# Altium PCB Carrier_Board.PcbDoc (part 1 of 2)
Units mil, origin at the board's own origin, x right, y up, seen from the top; angles counter-clockwise.
Board outline 6800 x 4000 mil, 4 copper layers (Top Layer, PWR, GND, Bottom Layer), stack 62.8 mil thick; 110 components, 87 nets, 805 pads, 134 vias.
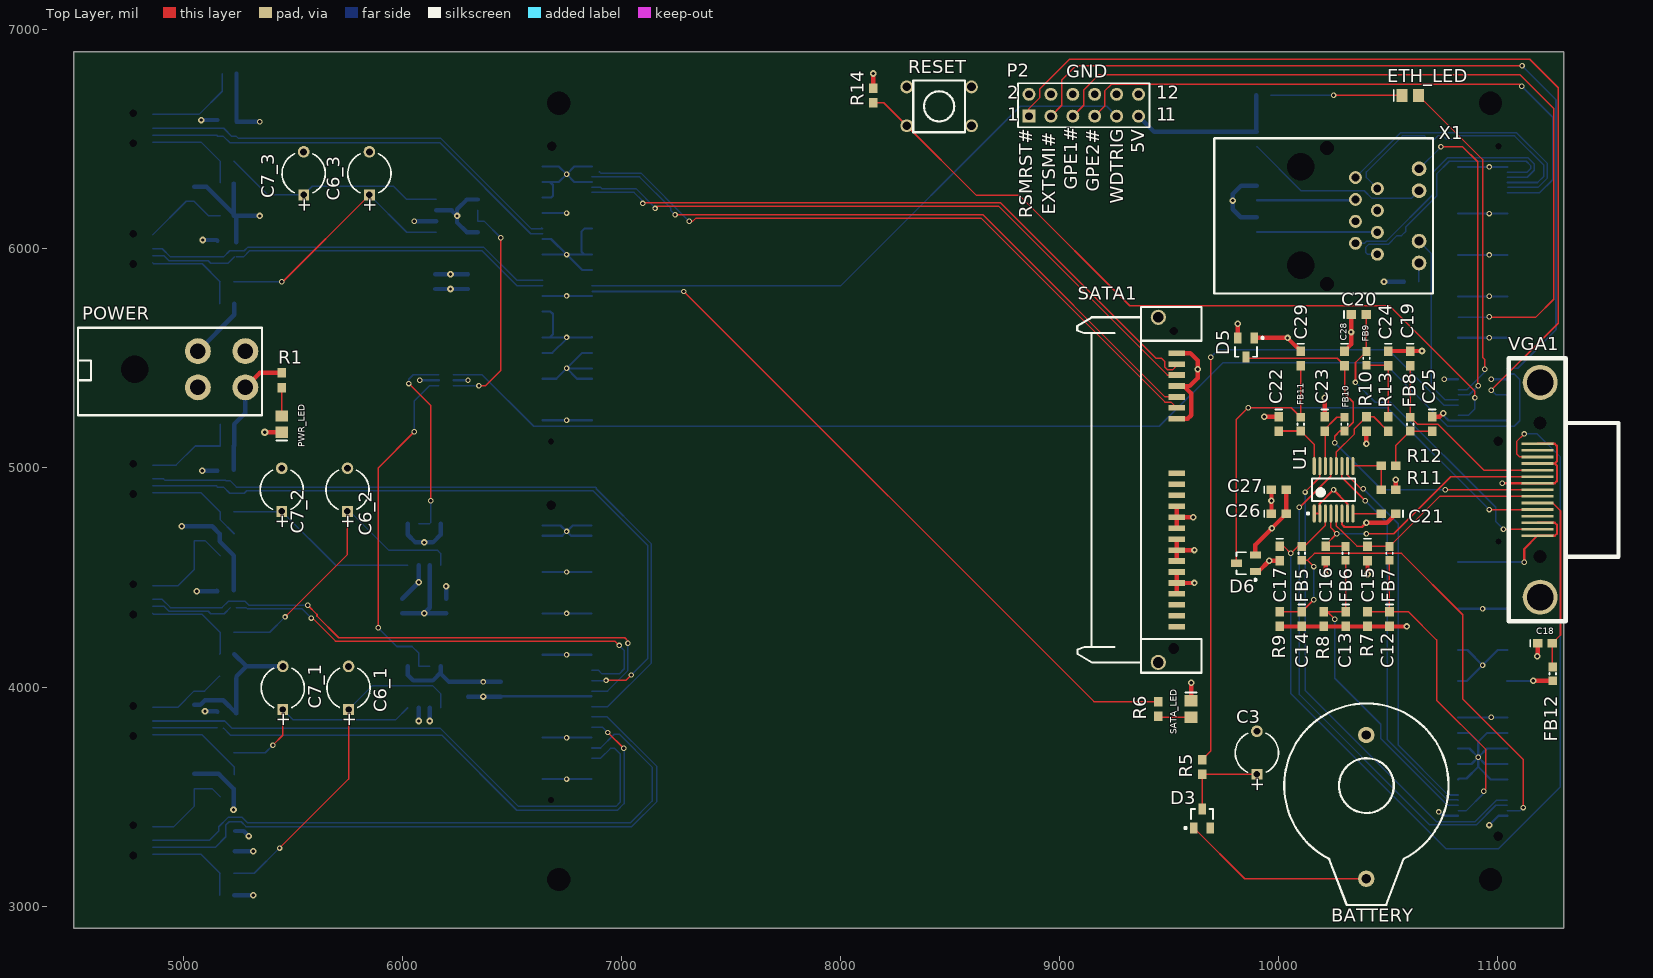
[diagram p0: Top Layer view]
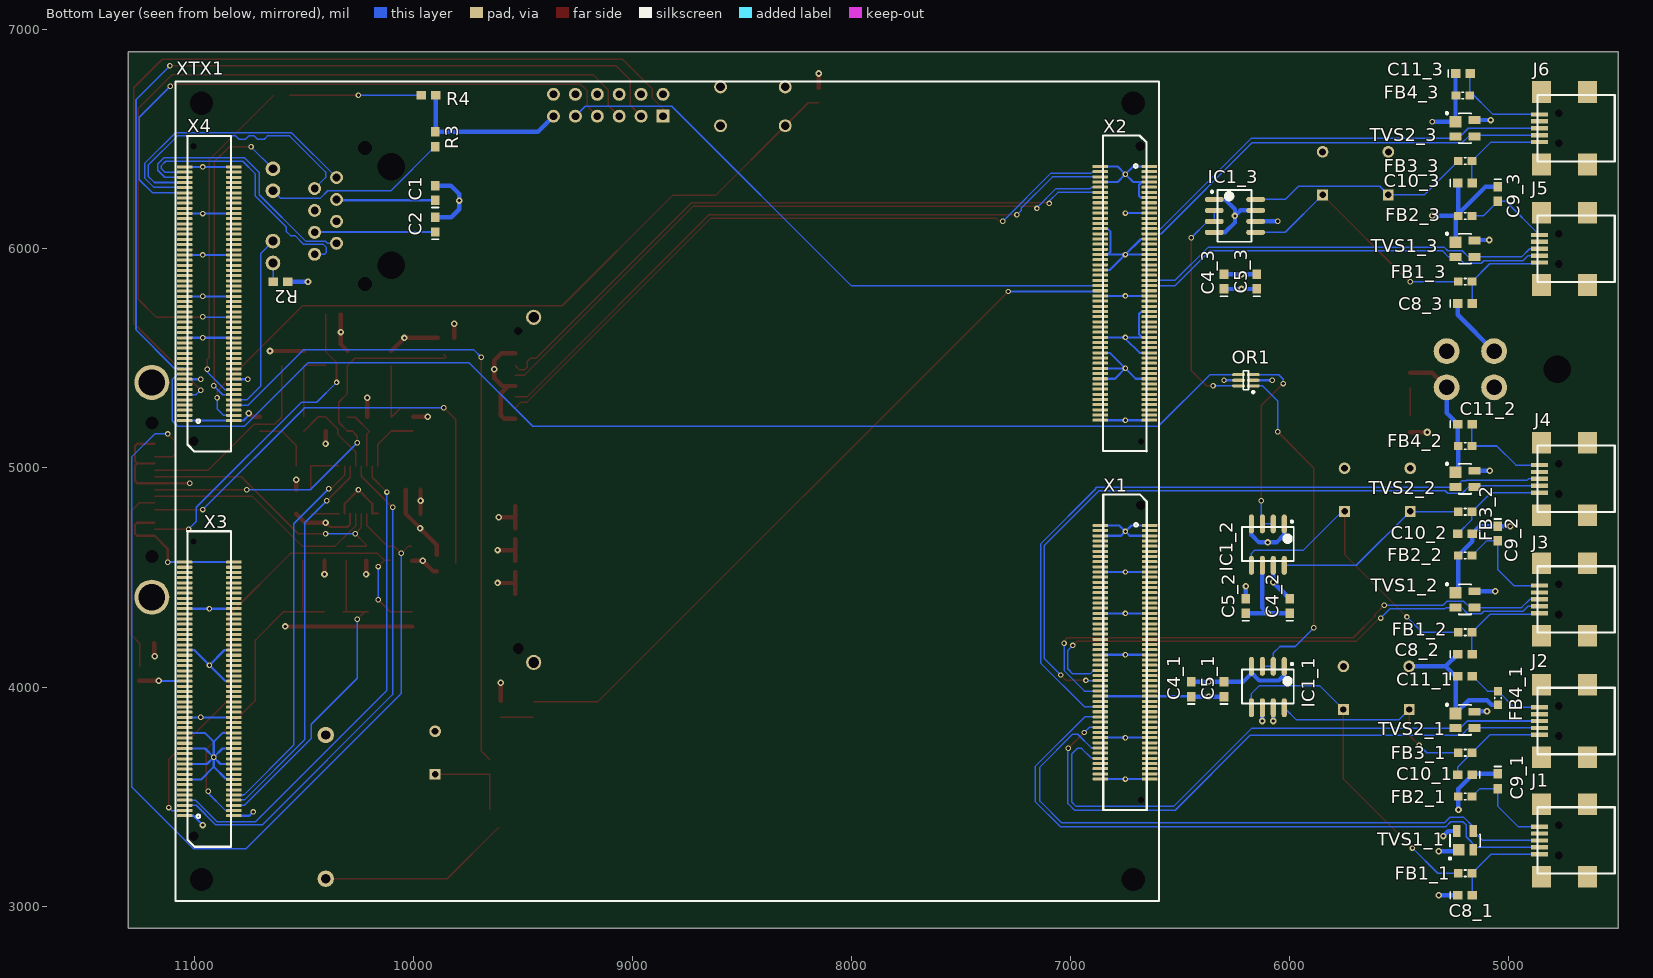
[diagram p1: Bottom Layer view, seen from below]
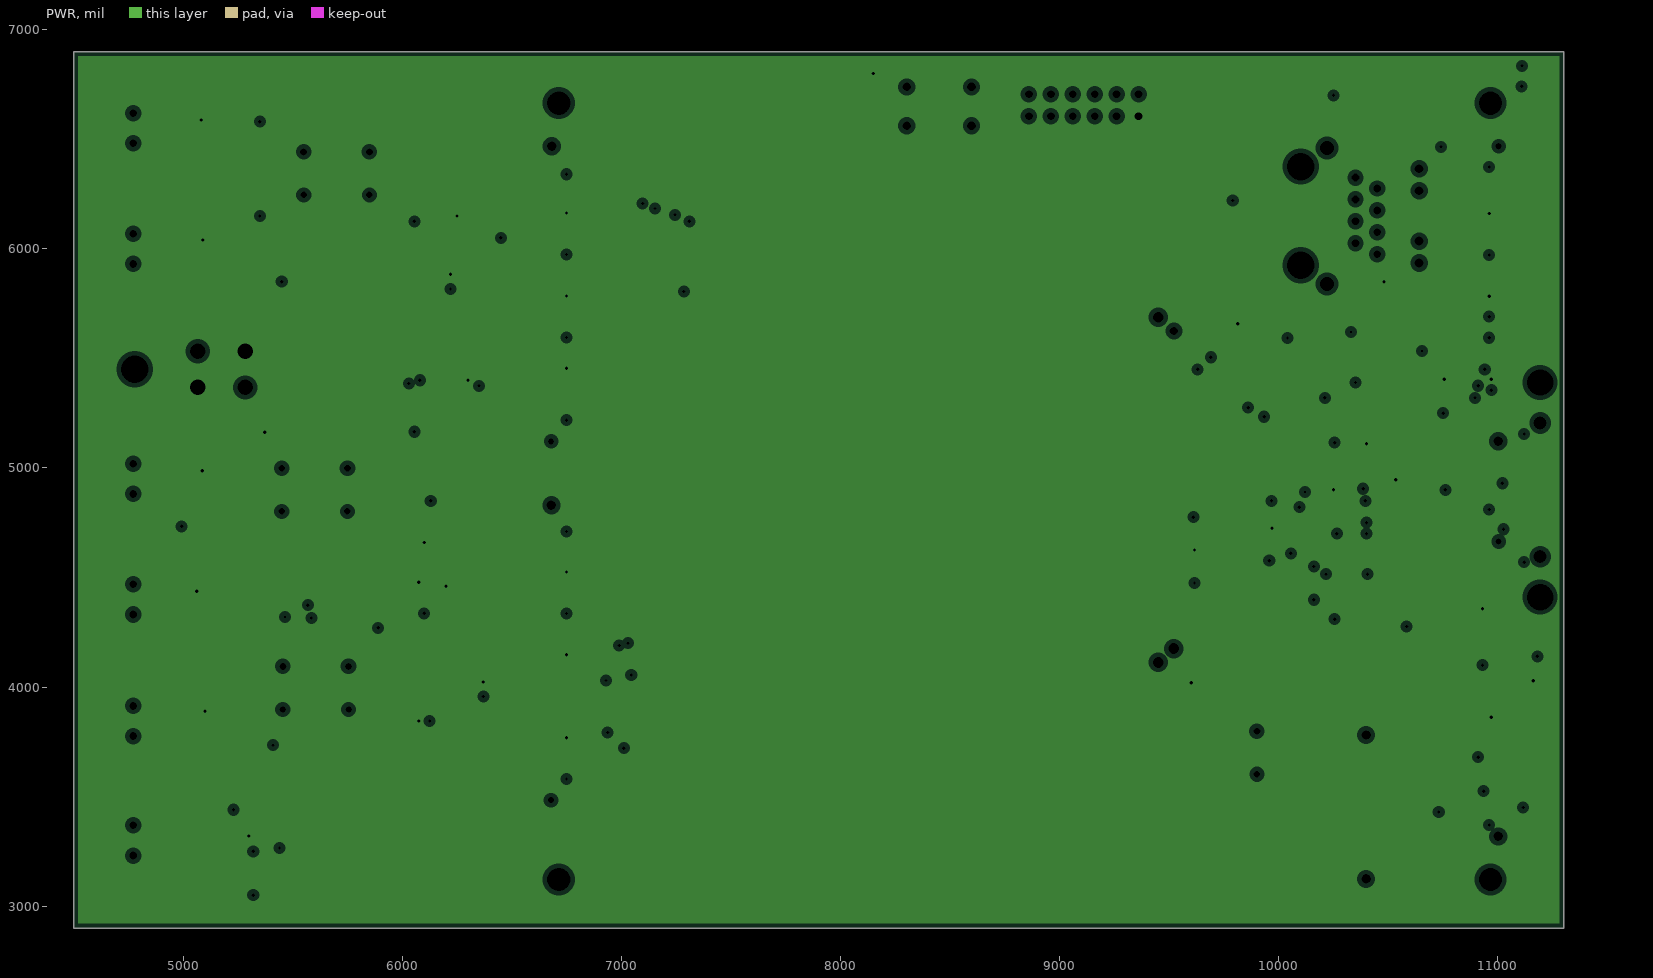
[diagram p2: PWR, clearances drawn from the general rule]
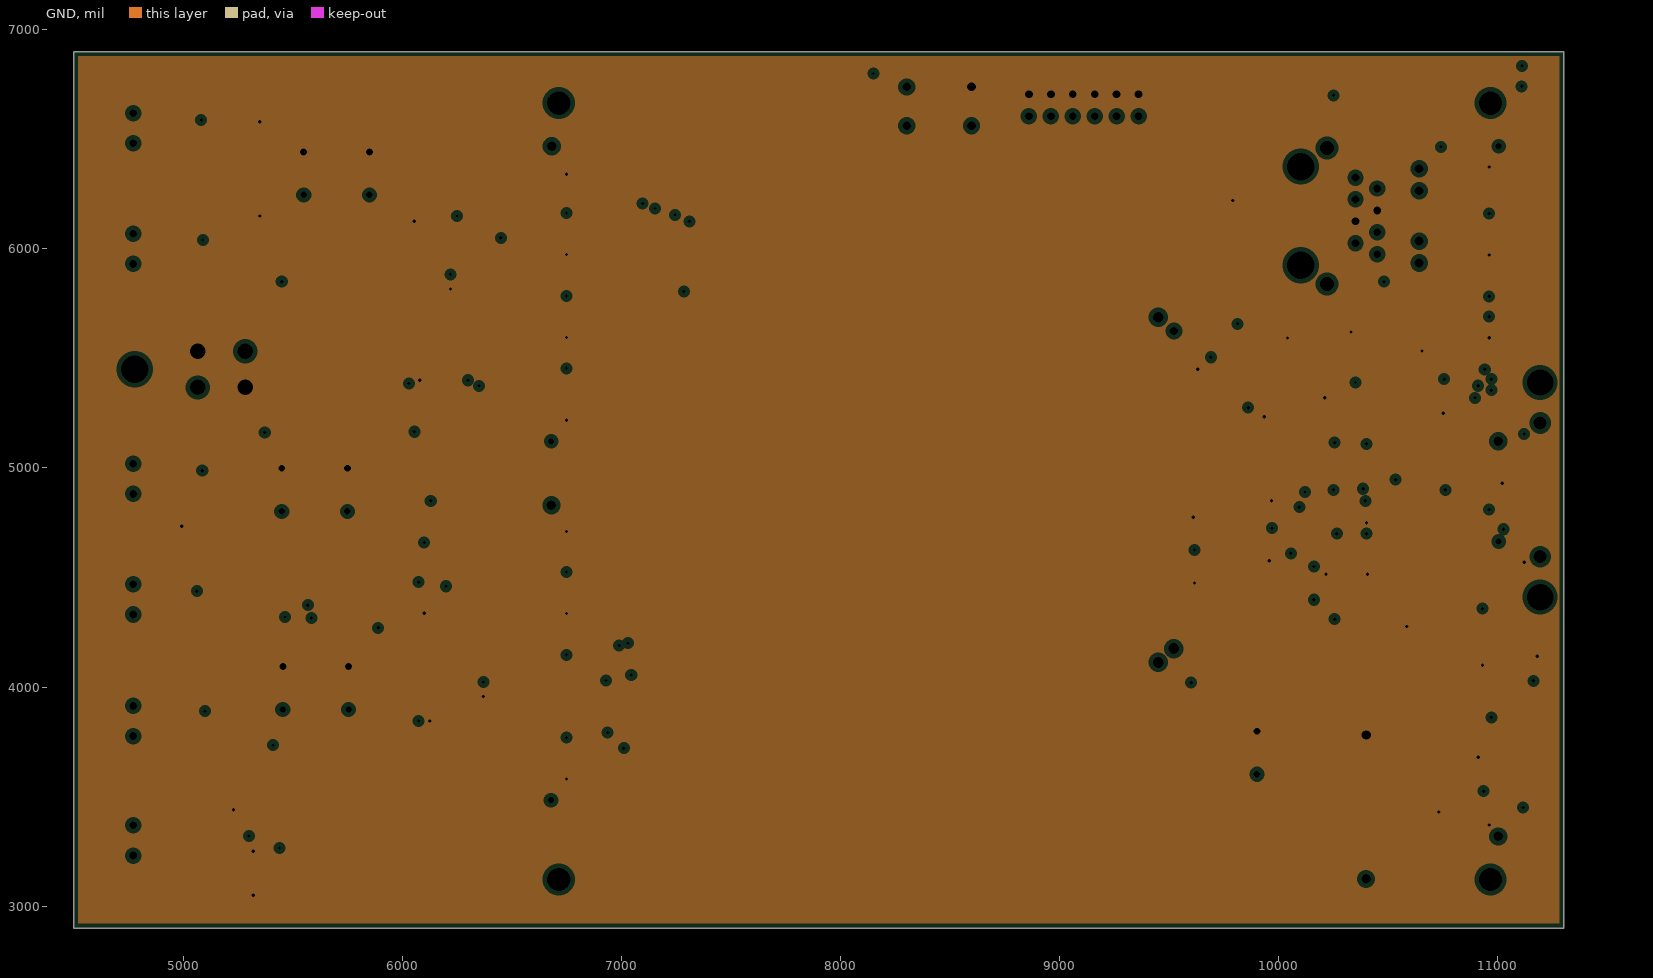
[diagram p3: GND, clearances drawn from the general rule]

## Layer stack, top to bottom
Top Layer: signal copper 1.4
Dielectric: core 32, FR-4, Dk 4.8
PWR: plane copper 1.4, net 5V
Dielectric: prepreg 12.6, FR-4, Dk 4.8
GND: plane copper 1.4, net GND
Dielectric: core 12.6, FR-4, Dk 4.8
Bottom Layer: signal copper 1.4

## Board outline
4500,6900 4500,2900 11300,2900 11300,6900

## Design rules (kind name [scope] priority, off if disabled: settings)
Clearance [All] p1: gap=7
ComponentClearance [All] p1: gap=4 collisioncheckmode=3 verticalgap=10 showdistances=FALSE
DiffPairsRouting "Schematic Differential Pairs Routing_26" [InNet('USB0_P')] p1: maxlimit=10 minlimit=5 mostfreqgap=5 maxuncoupledlength=200
DiffPairsRouting "Schematic Differential Pairs Routing_25" [InNet('USB0_P')] p2: maxlimit=10 minlimit=5 mostfreqgap=5 maxuncoupledlength=200
DiffPairsRouting "Schematic Differential Pairs Routing_24" [InNet('USB0_P')] p3: maxlimit=10 minlimit=5 mostfreqgap=5 maxuncoupledlength=200
DiffPairsRouting "Schematic Differential Pairs Routing_23" [InNet('USB0_N')] p4: maxlimit=10 minlimit=5 mostfreqgap=5 maxuncoupledlength=200
DiffPairsRouting "Schematic Differential Pairs Routing_22" [InNet('USB0_N')] p5: maxlimit=10 minlimit=5 mostfreqgap=5 maxuncoupledlength=200
DiffPairsRouting "Schematic Differential Pairs Routing_21" [InNet('USB0_N')] p6: maxlimit=10 minlimit=5 mostfreqgap=5 maxuncoupledlength=200
DiffPairsRouting "Schematic Differential Pairs Routing_43" [InNet('USB3_P')] p7: maxlimit=10 minlimit=5 mostfreqgap=5 maxuncoupledlength=200
DiffPairsRouting "Schematic Differential Pairs Routing_42" [InNet('USB3_P')] p8: maxlimit=10 minlimit=5 mostfreqgap=5 maxuncoupledlength=200
DiffPairsRouting "Schematic Differential Pairs Routing_41" [InNet('USB3_N')] p9: maxlimit=10 minlimit=5 mostfreqgap=5 maxuncoupledlength=200
DiffPairsRouting "Schematic Differential Pairs Routing_40" [InNet('USB3_N')] p10: maxlimit=10 minlimit=5 mostfreqgap=5 maxuncoupledlength=200
DiffPairsRouting "Schematic Differential Pairs Routing_39" [InNet('USB3_N')] p11: maxlimit=10 minlimit=5 mostfreqgap=5 maxuncoupledlength=200
DiffPairsRouting "Schematic Differential Pairs Routing_38" [InNet('USB2_P')] p12: maxlimit=10 minlimit=5 mostfreqgap=5 maxuncoupledlength=200
DiffPairsRouting "Schematic Differential Pairs Routing_37" [InNet('USB2_P')] p13: maxlimit=10 minlimit=5 mostfreqgap=5 maxuncoupledlength=200
DiffPairsRouting "Schematic Differential Pairs Routing_36" [InNet('USB2_P')] p14: maxlimit=10 minlimit=5 mostfreqgap=5 maxuncoupledlength=200
DiffPairsRouting "Schematic Differential Pairs Routing_35" [InNet('USB2_N')] p15: maxlimit=10 minlimit=5 mostfreqgap=5 maxuncoupledlength=200
DiffPairsRouting "Schematic Differential Pairs Routing_34" [InNet('USB2_N')] p16: maxlimit=10 minlimit=5 mostfreqgap=5 maxuncoupledlength=200
DiffPairsRouting "Schematic Differential Pairs Routing_33" [InNet('USB2_N')] p17: maxlimit=10 minlimit=5 mostfreqgap=5 maxuncoupledlength=200
DiffPairsRouting "Schematic Differential Pairs Routing_32" [InNet('USB1_P')] p18: maxlimit=10 minlimit=5 mostfreqgap=5 maxuncoupledlength=200
DiffPairsRouting "Schematic Differential Pairs Routing_31" [InNet('USB1_P')] p19: maxlimit=10 minlimit=5 mostfreqgap=5 maxuncoupledlength=200
DiffPairsRouting "Schematic Differential Pairs Routing_30" [InNet('USB1_P')] p20: maxlimit=10 minlimit=5 mostfreqgap=5 maxuncoupledlength=200
DiffPairsRouting "Schematic Differential Pairs Routing_29" [InNet('USB1_N')] p21: maxlimit=10 minlimit=5 mostfreqgap=5 maxuncoupledlength=200
DiffPairsRouting "Schematic Differential Pairs Routing_28" [InNet('USB1_N')] p22: maxlimit=10 minlimit=5 mostfreqgap=5 maxuncoupledlength=200
DiffPairsRouting "Schematic Differential Pairs Routing_27" [InNet('USB1_N')] p23: maxlimit=10 minlimit=5 mostfreqgap=5 maxuncoupledlength=200
DiffPairsRouting "Schematic Differential Pairs Routing_20" [InNet('USB5_P')] p24: maxlimit=10 minlimit=5 mostfreqgap=5 maxuncoupledlength=200
DiffPairsRouting "Schematic Differential Pairs Routing_19" [InNet('USB5_P')] p25: maxlimit=10 minlimit=5 mostfreqgap=5 maxuncoupledlength=200
DiffPairsRouting "Schematic Differential Pairs Routing_18" [InNet('USB5_N')] p26: maxlimit=10 minlimit=5 mostfreqgap=5 maxuncoupledlength=200
DiffPairsRouting "Schematic Differential Pairs Routing_17" [InNet('USB5_N')] p27: maxlimit=10 minlimit=5 mostfreqgap=5 maxuncoupledlength=200
DiffPairsRouting "Schematic Differential Pairs Routing_16" [InNet('USB5_N')] p28: maxlimit=10 minlimit=5 mostfreqgap=5 maxuncoupledlength=200
DiffPairsRouting "Schematic Differential Pairs Routing_15" [InNet('USB4_P')] p29: maxlimit=10 minlimit=5 mostfreqgap=5 maxuncoupledlength=200
DiffPairsRouting "Schematic Differential Pairs Routing_14" [InNet('USB4_P')] p30: maxlimit=10 minlimit=5 mostfreqgap=5 maxuncoupledlength=200
DiffPairsRouting "Schematic Differential Pairs Routing_13" [InNet('USB4_P')] p31: maxlimit=10 minlimit=5 mostfreqgap=5 maxuncoupledlength=200
DiffPairsRouting "Schematic Differential Pairs Routing_12" [InNet('USB4_N')] p32: maxlimit=10 minlimit=5 mostfreqgap=5 maxuncoupledlength=200
DiffPairsRouting "Schematic Differential Pairs Routing_11" [InNet('USB4_N')] p33: maxlimit=10 minlimit=5 mostfreqgap=5 maxuncoupledlength=200
DiffPairsRouting "Schematic Differential Pairs Routing_10" [InNet('USB4_N')] p34: maxlimit=10 minlimit=5 mostfreqgap=5 maxuncoupledlength=200
DiffPairsRouting "Schematic Differential Pairs Routing_9" [InNet('USB3_P')] p35: maxlimit=10 minlimit=5 mostfreqgap=5 maxuncoupledlength=200
DiffPairsRouting "Schematic Differential Pairs Routing_8" [InNet('USB5_P')] p36: maxlimit=10 minlimit=5 mostfreqgap=5 maxuncoupledlength=200
DiffPairsRouting "Schematic Differential Pairs Routing_7" [InNet('TXD_P')] p37: maxlimit=7 minlimit=4 mostfreqgap=4 maxuncoupledlength=200
DiffPairsRouting "Schematic Differential Pairs Routing_6" [InNet('TXD_N')] p38: maxlimit=7 minlimit=4 mostfreqgap=4 maxuncoupledlength=200
DiffPairsRouting "Schematic Differential Pairs Routing_5" [InNet('RXD_P')] p39: maxlimit=7 minlimit=4 mostfreqgap=4 maxuncoupledlength=200
DiffPairsRouting "Schematic Differential Pairs Routing_4" [InNet('RXD_N')] p40: maxlimit=7 minlimit=4 mostfreqgap=4 maxuncoupledlength=200
DiffPairsRouting "Schematic Differential Pairs Routing_3" [InNet('RX_P')] p41: maxlimit=7 minlimit=4 mostfreqgap=4 maxuncoupledlength=200
DiffPairsRouting "Schematic Differential Pairs Routing_2" [InNet('TX_P')] p42: maxlimit=7 minlimit=4 mostfreqgap=4 maxuncoupledlength=200
DiffPairsRouting "Schematic Differential Pairs Routing_1" [InNet('RX_N')] p43: maxlimit=7 minlimit=4 mostfreqgap=4 maxuncoupledlength=200
DiffPairsRouting "Schematic Differential Pairs Routing" [InNet('TX_N')] p44: maxlimit=7 minlimit=4 mostfreqgap=4 maxuncoupledlength=200
DiffPairsRouting [All] p45: maxlimit=10 minlimit=10 mostfreqgap=10 maxuncoupledlength=500
HoleSize [All] p1: absolutevalues=TRUE maxlimit=200 minlimit=15 maxpercent=80.000 minpercent=20.000
Length "Schematic Length Constraint_43" [InNet('USB3_P')] p1: maxlimit=15000 minlimit=0
Length "Schematic Length Constraint_42" [InNet('USB3_N')] p2: maxlimit=15000 minlimit=0
Length "Schematic Length Constraint_41" [InNet('USB3_N')] p3: maxlimit=15000 minlimit=0
Length "Schematic Length Constraint_40" [InNet('USB3_N')] p4: maxlimit=15000 minlimit=0
Length "Schematic Length Constraint_39" [InNet('USB2_P')] p5: maxlimit=15000 minlimit=0
Length "Schematic Length Constraint_38" [InNet('USB2_P')] p6: maxlimit=15000 minlimit=0
Length "Schematic Length Constraint_37" [InNet('USB2_P')] p7: maxlimit=15000 minlimit=0
Length "Schematic Length Constraint_36" [InNet('USB2_N')] p8: maxlimit=15000 minlimit=0
Length "Schematic Length Constraint_35" [InNet('USB2_N')] p9: maxlimit=15000 minlimit=0
Length "Schematic Length Constraint_34" [InNet('USB2_N')] p10: maxlimit=15000 minlimit=0
Length "Schematic Length Constraint_33" [InNet('USB1_P')] p11: maxlimit=15000 minlimit=0
Length "Schematic Length Constraint_32" [InNet('USB1_P')] p12: maxlimit=15000 minlimit=0
Length "Schematic Length Constraint_31" [InNet('USB1_P')] p13: maxlimit=15000 minlimit=0
Length "Schematic Length Constraint_30" [InNet('USB1_N')] p14: maxlimit=15000 minlimit=0
Length "Schematic Length Constraint_29" [InNet('USB1_N')] p15: maxlimit=15000 minlimit=0
Length "Schematic Length Constraint_28" [InNet('USB1_N')] p16: maxlimit=15000 minlimit=0
Length "Schematic Length Constraint_27" [InNet('USB0_P')] p17: maxlimit=15000 minlimit=0
Length "Schematic Length Constraint_26" [InNet('USB0_P')] p18: maxlimit=15000 minlimit=0
Length "Schematic Length Constraint_25" [InNet('USB0_P')] p19: maxlimit=15000 minlimit=0
Length "Schematic Length Constraint_24" [InNet('USB0_N')] p20: maxlimit=15000 minlimit=0
Length "Schematic Length Constraint_23" [InNet('USB0_N')] p21: maxlimit=15000 minlimit=0
Length "Schematic Length Constraint_22" [InNet('USB0_N')] p22: maxlimit=15000 minlimit=0
Length "Schematic Length Constraint_21" [InNet('USB5_P')] p23: maxlimit=15000 minlimit=0
Length "Schematic Length Constraint_20" [InNet('USB5_P')] p24: maxlimit=15000 minlimit=0
Length "Schematic Length Constraint_19" [InNet('USB5_P')] p25: maxlimit=15000 minlimit=0
Length "Schematic Length Constraint_18" [InNet('USB5_N')] p26: maxlimit=15000 minlimit=0
Length "Schematic Length Constraint_17" [InNet('USB5_N')] p27: maxlimit=15000 minlimit=0
Length "Schematic Length Constraint_16" [InNet('USB5_N')] p28: maxlimit=15000 minlimit=0
Length "Schematic Length Constraint_15" [InNet('USB4_P')] p29: maxlimit=15000 minlimit=0
Length "Schematic Length Constraint_14" [InNet('USB4_P')] p30: maxlimit=15000 minlimit=0
Length "Schematic Length Constraint_13" [InNet('USB4_P')] p31: maxlimit=15000 minlimit=0
Length "Schematic Length Constraint_12" [InNet('USB4_N')] p32: maxlimit=15000 minlimit=0
Length "Schematic Length Constraint_11" [InNet('USB4_N')] p33: maxlimit=15000 minlimit=0
Length "Schematic Length Constraint_10" [InNet('USB4_N')] p34: maxlimit=15000 minlimit=0
Length "Schematic Length Constraint_9" [InNet('USB3_P')] p35: maxlimit=15000 minlimit=0
Length "Schematic Length Constraint_8" [InNet('USB3_P')] p36: maxlimit=15000 minlimit=0
Length "Schematic Length Constraint_7" [InNet('TXD_P')] p37: maxlimit=4000 minlimit=0
Length "Schematic Length Constraint_6" [InNet('TXD_N')] p38: maxlimit=4000 minlimit=0
Length "Schematic Length Constraint_5" [InNet('RXD_P')] p39: maxlimit=4000 minlimit=0
Length "Schematic Length Constraint_4" [InNet('RXD_N')] p40: maxlimit=4000 minlimit=0
Length "Schematic Length Constraint_3" [InNet('RX_P')] p41: maxlimit=4000 minlimit=0
Length "Schematic Length Constraint_2" [InNet('TX_P')] p42: maxlimit=4000 minlimit=0
Length "Schematic Length Constraint_1" [InNet('RX_N')] p43: maxlimit=4000 minlimit=0
Length "Schematic Length Constraint" [InNet('TX_N')] p44: maxlimit=4000 minlimit=0
MatchedLengths "Schematic Matched Net Lengths_7" [InNet('TXD_P')] p1: tolerance=5 checknetsindiffpair=TRUE checkdiffpairvsdiffpair=TRUE checkothers=FALSE
MatchedLengths "Schematic Matched Net Lengths_6" [InNet('TXD_N')] p2: tolerance=5 checknetsindiffpair=TRUE checkdiffpairvsdiffpair=TRUE checkothers=FALSE
MatchedLengths "Schematic Matched Net Lengths_5" [InNet('RXD_P')] p3: tolerance=5 checknetsindiffpair=TRUE checkdiffpairvsdiffpair=TRUE checkothers=FALSE
MatchedLengths "Schematic Matched Net Lengths_4" [InNet('RX_P')] p4: tolerance=5 checknetsindiffpair=TRUE checkdiffpairvsdiffpair=TRUE checkothers=FALSE
MatchedLengths "Schematic Matched Net Lengths_3" [InNet('RXD_N')] p5: tolerance=5 checknetsindiffpair=TRUE checkdiffpairvsdiffpair=TRUE checkothers=FALSE
MatchedLengths "Schematic Matched Net Lengths_2" [InNet('TX_P')] p6: tolerance=5 checknetsindiffpair=TRUE checkdiffpairvsdiffpair=TRUE checkothers=FALSE
MatchedLengths "Schematic Matched Net Lengths_1" [InNet('RX_N')] p7: tolerance=5 checknetsindiffpair=TRUE checkdiffpairvsdiffpair=TRUE checkothers=FALSE
MatchedLengths "Schematic Matched Net Lengths" [InNet('TX_N')] p8: tolerance=5 checknetsindiffpair=TRUE checkdiffpairvsdiffpair=TRUE checkothers=FALSE
MaxMinImpedance "Schematic Impedance Constraint_35" [InNet('USB3_P')] p1: minimum=0.000 maximum=105.0
MaxMinImpedance "Schematic Impedance Constraint_34" [InNet('USB3_N')] p2: minimum=0.000 maximum=105.0
MaxMinImpedance "Schematic Impedance Constraint_33" [InNet('USB3_N')] p3: minimum=0.000 maximum=105.0
MaxMinImpedance "Schematic Impedance Constraint_32" [InNet('USB3_N')] p4: minimum=0.000 maximum=105.0
MaxMinImpedance "Schematic Impedance Constraint_31" [InNet('USB2_P')] p5: minimum=0.000 maximum=105.0
MaxMinImpedance "Schematic Impedance Constraint_30" [InNet('USB2_P')] p6: minimum=0.000 maximum=105.0
MaxMinImpedance "Schematic Impedance Constraint_29" [InNet('USB2_P')] p7: minimum=0.000 maximum=105.0
MaxMinImpedance "Schematic Impedance Constraint_28" [InNet('USB2_N')] p8: minimum=0.000 maximum=105.0
MaxMinImpedance "Schematic Impedance Constraint_27" [InNet('USB2_N')] p9: minimum=0.000 maximum=105.0
MaxMinImpedance "Schematic Impedance Constraint_26" [InNet('USB2_N')] p10: minimum=0.000 maximum=105.0
MaxMinImpedance "Schematic Impedance Constraint_25" [InNet('USB1_P')] p11: minimum=0.000 maximum=105.0
MaxMinImpedance "Schematic Impedance Constraint_24" [InNet('USB1_P')] p12: minimum=0.000 maximum=105.0
MaxMinImpedance "Schematic Impedance Constraint_23" [InNet('USB1_P')] p13: minimum=0.000 maximum=105.0
MaxMinImpedance "Schematic Impedance Constraint_22" [InNet('USB1_N')] p14: minimum=0.000 maximum=105.0
MaxMinImpedance "Schematic Impedance Constraint_21" [InNet('USB1_N')] p15: minimum=0.000 maximum=105.0
MaxMinImpedance "Schematic Impedance Constraint_20" [InNet('USB1_N')] p16: minimum=0.000 maximum=105.0
MaxMinImpedance "Schematic Impedance Constraint_19" [InNet('USB0_P')] p17: minimum=0.000 maximum=105.0
MaxMinImpedance "Schematic Impedance Constraint_18" [InNet('USB0_P')] p18: minimum=0.000 maximum=105.0
MaxMinImpedance "Schematic Impedance Constraint_17" [InNet('USB0_P')] p19: minimum=0.000 maximum=105.0
MaxMinImpedance "Schematic Impedance Constraint_16" [InNet('USB0_N')] p20: minimum=0.000 maximum=105.0
MaxMinImpedance "Schematic Impedance Constraint_15" [InNet('USB0_N')] p21: minimum=0.000 maximum=105.0
MaxMinImpedance "Schematic Impedance Constraint_14" [InNet('USB0_N')] p22: minimum=0.000 maximum=105.0
MaxMinImpedance "Schematic Impedance Constraint_13" [InNet('USB5_P')] p23: minimum=0.000 maximum=105.0
MaxMinImpedance "Schematic Impedance Constraint_12" [InNet('USB5_P')] p24: minimum=0.000 maximum=105.0
MaxMinImpedance "Schematic Impedance Constraint_11" [InNet('USB5_P')] p25: minimum=0.000 maximum=105.0
MaxMinImpedance "Schematic Impedance Constraint_10" [InNet('USB5_N')] p26: minimum=0.000 maximum=105.0
MaxMinImpedance "Schematic Impedance Constraint_9" [InNet('USB5_N')] p27: minimum=0.000 maximum=105.0
MaxMinImpedance "Schematic Impedance Constraint_8" [InNet('USB5_N')] p28: minimum=0.000 maximum=105.0
MaxMinImpedance "Schematic Impedance Constraint_7" [InNet('USB4_P')] p29: minimum=0.000 maximum=105.0
MaxMinImpedance "Schematic Impedance Constraint_6" [InNet('USB4_P')] p30: minimum=0.000 maximum=105.0
MaxMinImpedance "Schematic Impedance Constraint_5" [InNet('USB4_P')] p31: minimum=0.000 maximum=105.0
MaxMinImpedance "Schematic Impedance Constraint_4" [InNet('USB4_N')] p32: minimum=0.000 maximum=105.0
MaxMinImpedance "Schematic Impedance Constraint_3" [InNet('USB4_N')] p33: minimum=0.000 maximum=105.0
MaxMinImpedance "Schematic Impedance Constraint_2" [InNet('USB4_N')] p34: minimum=0.000 maximum=105.0
MaxMinImpedance "Schematic Impedance Constraint_1" [InNet('USB3_P')] p35: minimum=0.000 maximum=105.0
MaxMinImpedance "Schematic Impedance Constraint" [InNet('USB3_P')] p36: minimum=0.000 maximum=105.0
MaximumViaCount "Schematic Maximum Via Count Constraint_43" [InNet('USB3_P')] p1: limit=4
MaximumViaCount "Schematic Maximum Via Count Constraint_42" [InNet('USB3_P')] p2: limit=4
MaximumViaCount "Schematic Maximum Via Count Constraint_41" [InNet('USB3_N')] p3: limit=4
MaximumViaCount "Schematic Maximum Via Count Constraint_40" [InNet('USB3_N')] p4: limit=4
MaximumViaCount "Schematic Maximum Via Count Constraint_39" [InNet('USB3_N')] p5: limit=4
MaximumViaCount "Schematic Maximum Via Count Constraint_38" [InNet('USB2_P')] p6: limit=4
MaximumViaCount "Schematic Maximum Via Count Constraint_37" [InNet('USB2_P')] p7: limit=4
MaximumViaCount "Schematic Maximum Via Count Constraint_36" [InNet('USB2_P')] p8: limit=4
MaximumViaCount "Schematic Maximum Via Count Constraint_35" [InNet('USB2_N')] p9: limit=4
MaximumViaCount "Schematic Maximum Via Count Constraint_34" [InNet('USB2_N')] p10: limit=4
MaximumViaCount "Schematic Maximum Via Count Constraint_33" [InNet('USB2_N')] p11: limit=4
MaximumViaCount "Schematic Maximum Via Count Constraint_32" [InNet('USB1_P')] p12: limit=4
MaximumViaCount "Schematic Maximum Via Count Constraint_31" [InNet('USB1_P')] p13: limit=4
MaximumViaCount "Schematic Maximum Via Count Constraint_30" [InNet('USB1_P')] p14: limit=4
MaximumViaCount "Schematic Maximum Via Count Constraint_29" [InNet('USB1_N')] p15: limit=4
MaximumViaCount "Schematic Maximum Via Count Constraint_28" [InNet('USB1_N')] p16: limit=4
MaximumViaCount "Schematic Maximum Via Count Constraint_27" [InNet('USB1_N')] p17: limit=4
MaximumViaCount "Schematic Maximum Via Count Constraint_26" [InNet('USB0_P')] p18: limit=4
MaximumViaCount "Schematic Maximum Via Count Constraint_25" [InNet('USB0_P')] p19: limit=4
MaximumViaCount "Schematic Maximum Via Count Constraint_24" [InNet('USB0_P')] p20: limit=4
MaximumViaCount "Schematic Maximum Via Count Constraint_23" [InNet('USB0_N')] p21: limit=4
MaximumViaCount "Schematic Maximum Via Count Constraint_22" [InNet('USB0_N')] p22: limit=4
MaximumViaCount "Schematic Maximum Via Count Constraint_21" [InNet('USB0_N')] p23: limit=4
MaximumViaCount "Schematic Maximum Via Count Constraint_20" [InNet('TXD_P')] p24: limit=4
MaximumViaCount "Schematic Maximum Via Count Constraint_19" [InNet('TXD_N')] p25: limit=4
MaximumViaCount "Schematic Maximum Via Count Constraint_18" [InNet('RXD_P')] p26: limit=4
MaximumViaCount "Schematic Maximum Via Count Constraint_17" [InNet('RXD_N')] p27: limit=4
MaximumViaCount "Schematic Maximum Via Count Constraint_16" [InNet('RX_P')] p28: limit=4
MaximumViaCount "Schematic Maximum Via Count Constraint_15" [InNet('TX_P')] p29: limit=4
MaximumViaCount "Schematic Maximum Via Count Constraint_14" [InNet('RX_N')] p30: limit=4
MaximumViaCount "Schematic Maximum Via Count Constraint_13" [InNet('TX_N')] p31: limit=4
MaximumViaCount "Schematic Maximum Via Count Constraint_12" [InNet('USB5_P')] p32: limit=4
MaximumViaCount "Schematic Maximum Via Count Constraint_11" [InNet('USB5_P')] p33: limit=4
MaximumViaCount "Schematic Maximum Via Count Constraint_10" [InNet('USB5_P')] p34: limit=4
MaximumViaCount "Schematic Maximum Via Count Constraint_9" [InNet('USB5_N')] p35: limit=4
MaximumViaCount "Schematic Maximum Via Count Constraint_8" [InNet('USB5_N')] p36: limit=4
MaximumViaCount "Schematic Maximum Via Count Constraint_7" [InNet('USB5_N')] p37: limit=4
MaximumViaCount "Schematic Maximum Via Count Constraint_6" [InNet('USB4_P')] p38: limit=4
MaximumViaCount "Schematic Maximum Via Count Constraint_5" [InNet('USB4_P')] p39: limit=4
MaximumViaCount "Schematic Maximum Via Count Constraint_4" [InNet('USB4_P')] p40: limit=4
MaximumViaCount "Schematic Maximum Via Count Constraint_3" [InNet('USB4_N')] p41: limit=4
MaximumViaCount "Schematic Maximum Via Count Constraint_2" [InNet('USB4_N')] p42: limit=4
MaximumViaCount "Schematic Maximum Via Count Constraint_1" [InNet('USB4_N')] p43: limit=4
MaximumViaCount "Schematic Maximum Via Count Constraint" [InNet('USB3_P')] p44: limit=4
MinimumSolderMaskSliver [All] p1: minsoldermaskwidth=1
PlaneClearance [All] p1: clearance=20
PlaneConnect [All] p1: planeconnectstyle=Relief reliefexpansion=20 reliefentries=4 reliefconductorwidth=10 reliefairgap=10
PolygonConnect [All] p1: connectstyle=Relief reliefconductorwidth=10 reliefentries=4 polygonreliefangle="90 Angle"
RoutingVias [All] p1: holewidth=14 width=25 viastyle="Through Hole" minholewidth=14 minwidth=25 maxholewidth=24 maxwidth=50
SilkToSilkClearance [All] p1: silktosilkclearance=0
SilkscreenOverComponentPads [All] p1: minsilkscreentomaskgap=0
SolderMaskExpansion [All] p1: expansion=4
TestPointUsage [All] p1: valid=0 allowmultiple=FALSE
Testpoint [All] p1: side=15 testpointundercomponent=TRUE minsize=40 maxsize=100 preferedsize=60 minholesize=0 maxholesize=40 preferedholesize=32 testpointgrid=1 style=1023 order=0123456789
Width "Schematic Width Constraint_45" [InNet('GND')] p1: maxlimit=100 minlimit=10 preferedwidth=10 toplayer_prefwidth=20 bottomlayer_prefwidth=20 minimp=50.000000 maximp=50.000000 favimp=50.000000
Width "Schematic Width Constraint" [InNet('5V')] p2: maxlimit=100 minlimit=10 preferedwidth=10 toplayer_prefwidth=20 bottomlayer_prefwidth=20 minimp=50.000000 maximp=50.000000 favimp=50.000000
Width "Schematic Width Constraint_44" [InNet('USB3_P')] p3: maxlimit=7 minlimit=7 preferedwidth=7
Width "Schematic Width Constraint_43" [InNet('USB3_N')] p4: maxlimit=7 minlimit=7 preferedwidth=7
Width "Schematic Width Constraint_42" [InNet('USB3_N')] p5: maxlimit=7 minlimit=7 preferedwidth=7
Width "Schematic Width Constraint_41" [InNet('USB3_N')] p6: maxlimit=7 minlimit=7 preferedwidth=7
Width "Schematic Width Constraint_40" [InNet('USB2_P')] p7: maxlimit=7 minlimit=7 preferedwidth=7
Width "Schematic Width Constraint_39" [InNet('USB2_P')] p8: maxlimit=7 minlimit=7 preferedwidth=7
Width "Schematic Width Constraint_38" [InNet('USB2_P')] p9: maxlimit=7 minlimit=7 preferedwidth=7
Width "Schematic Width Constraint_37" [InNet('USB2_N')] p10: maxlimit=7 minlimit=7 preferedwidth=7
Width "Schematic Width Constraint_36" [InNet('USB2_N')] p11: maxlimit=7 minlimit=7 preferedwidth=7
Width "Schematic Width Constraint_35" [InNet('USB2_N')] p12: maxlimit=7 minlimit=7 preferedwidth=7
Width "Schematic Width Constraint_34" [InNet('USB1_P')] p13: maxlimit=7 minlimit=7 preferedwidth=7
Width "Schematic Width Constraint_33" [InNet('USB1_P')] p14: maxlimit=7 minlimit=7 preferedwidth=7
Width "Schematic Width Constraint_32" [InNet('USB1_P')] p15: maxlimit=7 minlimit=7 preferedwidth=7
Width "Schematic Width Constraint_31" [InNet('USB1_N')] p16: maxlimit=7 minlimit=7 preferedwidth=7
Width "Schematic Width Constraint_30" [InNet('USB1_N')] p17: maxlimit=7 minlimit=7 preferedwidth=7
Width "Schematic Width Constraint_29" [InNet('USB1_N')] p18: maxlimit=7 minlimit=7 preferedwidth=7
Width "Schematic Width Constraint_28" [InNet('USB0_P')] p19: maxlimit=7 minlimit=7 preferedwidth=7
Width "Schematic Width Constraint_27" [InNet('USB0_P')] p20: maxlimit=7 minlimit=7 preferedwidth=7
Width "Schematic Width Constraint_26" [InNet('USB0_P')] p21: maxlimit=7 minlimit=7 preferedwidth=7
Width "Schematic Width Constraint_25" [InNet('USB0_N')] p22: maxlimit=7 minlimit=7 preferedwidth=7
Width "Schematic Width Constraint_24" [InNet('USB0_N')] p23: maxlimit=7 minlimit=7 preferedwidth=7
Width "Schematic Width Constraint_23" [InNet('USB0_N')] p24: maxlimit=7 minlimit=7 preferedwidth=7
Width "Schematic Width Constraint_22" [InNet('USB5_P')] p25: maxlimit=7 minlimit=7 preferedwidth=7
Width "Schematic Width Constraint_21" [InNet('USB5_P')] p26: maxlimit=7 minlimit=7 preferedwidth=7
Width "Schematic Width Constraint_20" [InNet('USB5_P')] p27: maxlimit=7 minlimit=7 preferedwidth=7
Width "Schematic Width Constraint_19" [InNet('USB5_N')] p28: maxlimit=7 minlimit=7 preferedwidth=7
Width "Schematic Width Constraint_18" [InNet('USB5_N')] p29: maxlimit=7 minlimit=7 preferedwidth=7
Width "Schematic Width Constraint_17" [InNet('USB5_N')] p30: maxlimit=7 minlimit=7 preferedwidth=7
Width "Schematic Width Constraint_16" [InNet('USB4_P')] p31: maxlimit=7 minlimit=7 preferedwidth=7
Width "Schematic Width Constraint_15" [InNet('USB4_P')] p32: maxlimit=7 minlimit=7 preferedwidth=7
Width "Schematic Width Constraint_14" [InNet('USB4_P')] p33: maxlimit=7 minlimit=7 preferedwidth=7
Width "Schematic Width Constraint_13" [InNet('USB4_N')] p34: maxlimit=7 minlimit=7 preferedwidth=7
Width "Schematic Width Constraint_12" [InNet('USB4_N')] p35: maxlimit=7 minlimit=7 preferedwidth=7
Width "Schematic Width Constraint_11" [InNet('USB4_N')] p36: maxlimit=7 minlimit=7 preferedwidth=7
Width "Schematic Width Constraint_10" [InNet('USB3_P')] p37: maxlimit=7 minlimit=7 preferedwidth=7
Width "Schematic Width Constraint_9" [InNet('USB3_P')] p38: maxlimit=7 minlimit=7 preferedwidth=7
Width [All] p39: maxlimit=10 minlimit=7 preferedwidth=7
Width "Schematic Width Constraint_8" [InNet('TXD_P')] p40: maxlimit=6 minlimit=5 preferedwidth=5
Width "Schematic Width Constraint_7" [InNet('TXD_N')] p41: maxlimit=6 minlimit=5 preferedwidth=5
Width "Schematic Width Constraint_6" [InNet('RXD_P')] p42: maxlimit=6 minlimit=5 preferedwidth=5
Width "Schematic Width Constraint_5" [InNet('RXD_N')] p43: maxlimit=6 minlimit=5 preferedwidth=5
Width "Schematic Width Constraint_4" [InNet('RX_P')] p44: maxlimit=6 minlimit=5 preferedwidth=5
Width "Schematic Width Constraint_3" [InNet('TX_P')] p45: maxlimit=6 minlimit=5 preferedwidth=5
Width "Schematic Width Constraint_2" [InNet('RX_N')] p46: maxlimit=6 minlimit=5 preferedwidth=5
Width "Schematic Width Constraint_1" [InNet('TX_N')] p47: maxlimit=6 minlimit=5 preferedwidth=5
16 further rules are at their usual default settings.

## Classes and differential pairs
component class Carrier_Board: D1 J1 J2 J3 J4 J5 J6 J? OR1 P2 "Power In" PWR_LED R1
component class U_Ethernet: C1 C2 D2 ETH_LED R2 R3 R4 X1
component class U_Power: BATT1 BATTERY C3 D3 P? POWER "Power In1" PWR_IN R5
component class U_SATA: D4 R6 SATA1 SATA_LED
component class U_USB1: C4_1 C4_U_USB1 C5_1 C5_U_USB1 C6_1 C6_U_USB1 C7_1 C7_U_USB1 C8_1 C8_U_USB1 C9_1 C9_U_USB1 C10_1 C10_U_USB1 C11_1 C11_U_USB1 FB1_1 FB1_U_USB1 FB2_1 FB2_U_USB1 FB3_1 FB3_U_USB1 FB4_1 FB4_U_USB1 IC1_1 IC1_U_USB1 TVS1_1 TVS1_U_USB1 TVS2_1 TVS2_U_USB1
component class U_USB2: C4_2 C4_U_USB2 C5_2 C5_U_USB2 C6_2 C6_U_USB2 C7_2 C7_U_USB2 C8_2 C8_U_USB2 C9_2 C9_U_USB2 C10_2 C10_U_USB2 C11_2 C11_U_USB2 FB1_2 FB1_U_USB2 FB2_2 FB2_U_USB2 FB3_2 FB3_U_USB2 FB4_2 FB4_U_USB2 IC1_2 IC1_U_USB2 TVS1_2 TVS1_U_USB2 TVS2_2 TVS2_U_USB2
component class U_USB3: C4_3 C4_U_USB3 C5_3 C5_U_USB3 C6_3 C6_U_USB3 C7_3 C7_U_USB3 C8_3 C8_U_USB3 C9_3 C9_U_USB3 C10_3 C10_U_USB3 C11_3 C11_U_USB3 FB1_3 FB1_U_USB3 FB2_3 FB2_U_USB3 FB3_3 FB3_U_USB3 FB4_3 FB4_U_USB3 IC1_3 IC1_U_USB3 TVS1_3 TVS1_U_USB3 TVS2_3 TVS2_U_USB3
component class U_VGA: C12 C13 C14 C15 C16 C17 C18 C19 C20 C21 C22 C23 C24 C25 C26 C27 C28 C29 D5 D6 FB5 FB6 FB7 FB8 FB9 FB10 FB11 FB12 R7 R8 R9 R10 R11 R12 R13 U1 VGA1
component class U_XTX: btnReset R14 Reset XTX1
channel class USB: U_USB1 U_USB2 U_USB3
differential pair USB0: +USB0_P -USB0_N
differential pair USB1: +USB1_P -USB1_N
differential pair USB2: +USB2_P -USB2_N
differential pair USB3: +USB3_P -USB3_N
differential pair USB4: +USB4_P -USB4_N
differential pair USB5: +USB5_P -USB5_N
differential pair RX: +RX_P -RX_N
differential pair TXD: +TXD_P -TXD_N
differential pair TX: +TX_P -TX_N
differential pair RXD: +RXD_P -RXD_N

## Components (designator, comment, footprint, x,y, rotation, side; value= is the part's Value field where it differs from the comment)
BATTERY "BH600" BH600 10400,3550 r0 top (schematic designator BATT1)
C1 "Cap" 0603 9900,6255 r90 bottom
C2 "Cap" 0603 9900,6110 r90 bottom
C3 "Cap Pol1" CAPPR5-5x5 9900,3700 r90 top
C4_1 "Cap" 0603 6450,3990 r90 bottom (schematic designator C4)
C4_2 "Cap" 0603 6000,4370 r90 bottom (schematic designator C4)
C4_3 "Cap" 0603 6300,5850 r90 bottom (schematic designator C4)
C5_1 "Cap" 0603 6300,3990 r90 bottom (schematic designator C5)
C5_2 "Cap" 0603 6200,4370 r90 bottom (schematic designator C5)
C5_3 "Cap" 0603 6150,5850 r90 bottom (schematic designator C5)
C6_1 "Cap Pol1" CAPPR5-5x5 5755,3995.96 r90 top (schematic designator C6)
C6_2 "Cap Pol1" CAPPR5-5x5 5750,4900 r90 top (schematic designator C6)
C6_3 "Cap Pol1" CAPPR5-5x5 5850,6343.96 r90 top (schematic designator C6)
C7_1 "Cap Pol1" CAPPR5-5x5 5455,3995.96 r90 top (schematic designator C7)
C7_2 "Cap Pol1" CAPPR5-5x5 5450,4900 r90 top (schematic designator C7)
C7_3 "Cap Pol1" CAPPR5-5x5 5550,6343.96 r90 top (schematic designator C7)
C8_1 "Cap" 0603 5200,3050 r180 bottom (schematic designator C8)
C8_2 "Cap" 0603 5200,4150 r180 bottom (schematic designator C8)
C8_3 "Cap" 0603 5200,5750 r180 bottom (schematic designator C8)
C9_1 "Cap" 0603 5050,3570 r270 bottom (schematic designator C9)
C9_2 "Cap" 0603 5050,4700 r270 bottom (schematic designator C9)
C9_3 "Cap" 0603 5050,6250 r270 bottom (schematic designator C9)
C10_1 "Cap" 0603 5200,3600 r0 bottom (schematic designator C10)
C10_2 "Cap" 0603 5200,4700 r0 bottom (schematic designator C10)
C10_3 "Cap" 0603 5200,6300 r180 bottom (schematic designator C10)
C11_1 "Cap" 0603 5200,4050 r180 bottom (schematic designator C11)
C11_2 "Cap" 0603 5200,5200 r180 bottom (schematic designator C11)
C11_3 "Cap" 0603 5210,6800 r180 bottom (schematic designator C11)
C12 "Cap" 0603 10505,4310 r270 top
C13 "Cap" 0603 10305,4310 r270 top
C14 "Cap" 0603 10105,4310 r270 top
C15 "Cap" 0603 10405,4610 r270 top
C16 "Cap" 0603 10215,4610 r270 top
C17 "Cap" 0603 10005,4610 r270 top
C18 "Cap" 0603 11215,4200 r0 top
C19 "Cap" 0603 10600,5500 r270 top
C20 "Cap" 0603 10365,5700 r0 top
C21 "Cap" 0603 10500,4790 r180 top
C22 "Cap" 0603 10000,5200 r270 top
C23 "Cap" 0603 10210,5200 r270 top
C24 "Cap" 0603 10500,5500 r270 top
C25 "Cap" 0603 10700,5200 r270 top
C26 "Cap" 0603 10000,4790 r0 top
C27 "Cap" 0603 10000,4900 r0 top
C28 "Cap" 0603 10300,5500 r270 top
C29 "Cap" 0603 10100,5500 r270 top
D3 "BAV99" SOT23 9650,3400 r0 top
D5 "NUP1301" SOT23 9850,5550 r180 top
D6 "NUP1301" SOT23 9850,4565 r90 top
ETH_LED "ETH_LED" 0805 10600,6700 r0 top (schematic designator D2)
FB1_1 "100@100MHz" INDC1608X09N 5200,3150 r180 bottom (schematic designator FB1)
FB1_2 "100@100MHz" INDC1608X09N 5200,4250 r180 bottom (schematic designator FB1)
FB1_3 "100@100MHz" INDC1608X09N 5200,5850 r180 bottom (schematic designator FB1)
FB2_1 "100@100MHz" INDC1608X09N 5200,3500 r180 bottom (schematic designator FB2)
FB2_2 "100@100MHz" INDC1608X09N 5200,4600 r180 bottom (schematic designator FB2)
FB2_3 "100@100MHz" INDC1608X09N 5200,6150 r180 bottom (schematic designator FB2)
FB3_1 "100@100MHz" INDC1608X09N 5200,3700 r180 bottom (schematic designator FB3)
FB3_2 "100@100MHz" INDC1608X09N 5200,4800 r180 bottom (schematic designator FB3)
FB3_3 "100@100MHz" INDC1608X09N 5200,6400 r180 bottom (schematic designator FB3)
FB4_1 "100@100MHz" INDC1608X09N 5050,3950 r90 bottom (schematic designator FB4)
FB4_2 "100@100MHz" INDC1608X09N 5200,5100 r180 bottom (schematic designator FB4)
FB4_3 "100@100MHz" INDC1608X09N 5210,6700 r180 bottom (schematic designator FB4)
FB5 "120@100MHz" INDC1608X09N 10105,4610 r90 top
FB6 "120@100MHz" INDC1608X09N 10305,4610 r90 top
FB7 "120@100MHz" INDC1608X09N 10505,4610 r90 top
FB8 "120@100MHz" INDC1608X09N 10600,5200 r90 top
FB9 "120@100MHz" INDC1608X09N 10400,5500 r90 top
FB10 "120@100MHz" INDC1608X09N 10300,5200 r270 top
FB11 "120@100MHz" INDC1608X09N 10100,5200 r90 top
FB12 "100@100MHz" INDC1608X09N 11250,4060 r90 top
IC1_1 "MIC2026" "8-Pin SOIC" 6100,4000 r270 bottom (schematic designator IC1)
IC1_2 "MIC2026" "8-Pin SOIC" 6100,4650 r270 bottom (schematic designator IC1)
IC1_3 "MIC2026" "8-Pin SOIC" 6250,6150 r180 bottom (schematic designator IC1)
J1 "UX60-MB-5ST" UX60-MB-5ST 4900,3300 r90 bottom
J2 "UX60-MB-5ST" UX60-MB-5ST 4900,3845 r90 bottom
J3 "UX60-MB-5ST" UX60-MB-5ST 4900,4400 r90 bottom
J4 "UX60-MB-5ST" UX60-MB-5ST 4900,4950 r90 bottom
J5 "UX60-MB-5ST" UX60-MB-5ST 4900,6000 r90 bottom
J6 "UX60-MB-5ST" UX60-MB-5ST 4900,6550 r90 bottom
OR1 "OR Gate" TSOP65P210X110-6N 6200,5400 r0 bottom
P2 "Header 6X2" HDR2X6 8860,6605 r0 top
POWER "Power In" "0039300040 MINI-FIT JR 4-Pos Right Angle" 4780,5450 r270 top (schematic designator P1)
PWR_LED "LED" 0805 5450,5200 r90 top
R1 "Res3" J1-0603 5450,5400 r270 top
R2 "Res3" J1-0603 10605,5850 r0 bottom
R3 "Res3" J1-0603 9900,6500 r270 bottom
R4 "Res3" J1-0603 9930,6700 r0 bottom
R5 "Res3" J1-0603 9650,3635 r90 top
R6 "Res3" J1-0603 9450,3900 r270 top
R7 "Res3" J1-0603 10405,4310 r270 top
R8 "Res3" J1-0603 10205,4310 r270 top
R9 "Res3" J1-0603 10005,4310 r270 top
R10 "Res3" J1-0603 10400,5200 r270 top
R11 "Res3" J1-0603 10500,4900 r0 top
R12 "Res3" J1-0603 10500,5010 r180 top
R13 "Res3" J1-0603 10500,5200 r270 top
R14 "Res3" J1-0603 8150,6700 r90 top
RESET "FSM Switch" FSM4JH 8450,6650 r0 top (schematic designator btnReset)
SATA1 "SATA Drive" "SATA COMB RECEPTICLE" 9450,4900 r90 top locked
SATA_LED "SATA_LED" 0805 9600,3900 r270 top (schematic designator D4)
TVS1_1 "SR05.TCT" SOT143 5200,3300 r180 bottom (schematic designator TVS1)
TVS1_2 "SR05.TCT" SOT143 5200,4400 r270 bottom (schematic designator TVS1)
TVS1_3 "SR05.TCT" SOT143 5200,6000 r270 bottom (schematic designator TVS1)
TVS2_1 "SR05.TCT" SOT143 5200,3850 r270 bottom (schematic designator TVS2)
TVS2_2 "SR05.TCT" SOT143 5200,4950 r270 bottom (schematic designator TVS2)
TVS2_3 "SR05.TCT" SOT143 5200,6550 r270 bottom (schematic designator TVS2)
U1 "CM2009" SOP64P630X173-16N 10250,4900 r90 top
VGA1 "SM VGA connector" "15POS SM 30MIL-PITCH" 11180,4900 r270 top
X1 "48025-0002" 48025-0002 10350,6150 r270 top
XTX1 "XTX_Board" XTX_Board 6600,3025 r180 bottom locked

## Footprints (in the part's own frame and the unit in brackets; to place one, negate y for a bottom-side part, rotate by r counter-clockwise, add the part's x,y. Pads: shape width x height; smd on the part's side, far side on the other; paste and mask are expansions set on the pad)
"8-Pin SOIC" [mm] "SOIC, 8-Leads, Body 6.0x4.0mm (max), Pitch 1.27mm, IPC Medium Density"
  oval 2.2x0.6 smd: 1(-2.4,1.905) 2(-2.4,0.635) 3(-2.4,-0.635) 4(-2.4,-1.905) 5(2.4,-1.905) 6(2.4,-0.635) 7(2.4,0.635) 8(2.4,1.905)
  silkscreen extent -2.79,-3 1.91,3, body extent -1.99,-2.99 1.99,2.99, height 1.73
"15POS SM 30MIL-PITCH" [mil] "15 position surface mount 30 mils pitch"
  rect 12x146 smd: 1(-150,0) 2(-60,0) 3(30,0) 4(120,0) 5(210,0) 6(-210,0) 7(-120,0) 8(-30,0) 9(60,0) 10(150,0) 11(-180,0) 12(-90,0) 13(0,0) 14(90,0) 15(180,0)
  round 160 hole 120: CGND(-490,13) CGND(490,13)
  round 0 hole 59: ""(-305,13) ""(305,13)
  silkscreen extent -600,-130 600,370, body extent -592,-17 593,401, height 422
0603 [mm] "Chip Capacitor; Body 1.6 x 0.8 mm (LxW typ)"
  rect 1.1x1 smd: 1(-0.85,0) 2(0.85,0)
  silkscreen extent -1.7,-0.4 -1.7,0.4
0805 [mm] "Chip Capacitor; Body 2.0 x 1.2 mm (LxW typ)"
  rect 1.3x1.5 smd: 1(-0.95,0) 2(0.95,0)
  silkscreen extent -1.9,-0.65 -1.9,0.65
48025-0002 [mm] "Modular RJ45 Jack w/ Magnetics & LEDs"
  round 1.5 hole 0.89: 1(4.445,2.54) 2(3.175,0) 3(1.905,2.54) 4(0.635,0) 5(-0.635,2.54) 6(-1.905,0) 7(-3.175,2.54) 8(-4.445,0)
  round 1.7 hole 1.02: 9(5.461,7.366) 10(2.921,7.366) 11(-2.921,7.366) 12(-5.461,7.366)
  round 0 hole 1.63 unplated: ""(-7.874,-3.302) ""(7.874,-3.302)
  round 0 hole 3.18 unplated: ""(-5.715,-6.35) ""(5.715,-6.35)
  silkscreen extent -9,-16.37 9,9, body extent -9.13,-16.5 9.13,9.13, height 14.9
"0039300040 MINI-FIT JR 4-Pos Right Angle" [mm]
  round 0 hole 3.2: 0(0,0)
  round 3 hole 1.8: 1(-2.1,7.3) 2(2.1,7.3) 3(-2.1,12.8) 4(2.1,12.8)
  silkscreen extent -4.83,-6.6 5.33,14.73, body extent -4.8,-6.46 5.2,13.47, height 11.4
BH600 [mil] "16mm Battery Holder"
  round 75 hole 42: +(-1,-425) -(-1,231)
  silkscreen extent -375,-545 375,375, body extent -375,-545 375,375, height 330
CAPPR5-5x5 [mm] "Capacitor, Electrolytic, Radial; Body 5 x 5 mm (Dia.xH typ); Pin Spacing 5 mm (typ)"
  rect 1.25x1.25 hole 0.75: 1(-2.5,0)
  round 1.35 hole 0.8: 2(2.5,0)
  silkscreen extent -2.26,-2.5 2.27,2.5
FSM4JH [mm]
  round 1.5 hole 0.99: 1(-3.75,-2.25) 2(3.75,-2.25) 3(-3.75,2.25) 4(3.75,2.25)
  silkscreen extent -3,-3 3,3, body extent -3.13,-3.13 3.13,3.13, height 5
HDR2X6 [mm] "Connector; Header; 6x2 Position"
  rect 1.5x1.5 hole 0.9: 1(0,0)
  round 1.5 hole 0.9: 2(0,2.54) 3(2.54,0) 4(2.54,2.54) 5(5.08,0) 6(5.08,2.54) 7(7.62,0) 8(7.62,2.54) 9(10.16,0) 10(10.16,2.54) 11(12.7,0) 12(12.7,2.54)
  silkscreen extent -1.27,-1.27 13.97,3.81
INDC1608X09N [mm] "Chip Inductor, 2-Leads, Body 1.6x0.8mm, IPC Medium Density"
  rect 1x0.95 smd: 1(-0.8,0) 2(0.8,0)
  silkscreen extent -0.1,-0.38 0.1,0.38, body extent -0.88,-0.48 0.87,0.48, height 0.95
J1-0603 [mm] "Chip Resistor; Body 1.6 x 0.8 mm (LxW typ)"
  rect 1.1x1 smd: 1(-0.85,0) 2(0.85,0)
"SATA COMB RECEPTICLE" [mm] "Right Angle SATA Connector, FCI Part# 10029364"
  rect 0.65x1.9 smd: P1(1.905,-2.159) P2(0.635,-2.159) P3(-0.635,-2.159) P4(-1.905,-2.159) P5(-3.175,-2.159) P6(-4.445,-2.159) P7(-5.715,-2.159) P8(-6.985,-2.159) P9(-8.255,-2.159) P10(-9.525,-2.159) P11(-10.795,-2.159) P12(-12.065,-2.159) P13(-13.335,-2.159) P14(-14.605,-2.159) P15(-15.875,-2.159) S1(15.845,-2.15) S2(14.575,-2.15) S3(13.305,-2.15) S4(12.035,-2.15) S5(10.765,-2.15) S6(9.495,-2.15) S7(8.225,-2.15)
  round 1.75 hole 1.25 unplated: ""(-20,0) ""(20,0)
  round 0 hole 1.25 unplated: ""(-18.4,-1.8)
  round 0 hole 0.95 unplated: ""(18.4,-1.8)
  silkscreen extent -21.23,-5.02 21.2,9.4, body extent -21.2,-3 21.2,9.4, height 5.45
SOP64P630X173-16N [mm] "SOP, 16-Leads, Body 5.0x4.0mm (max), Pitch 0.64mm, IPC Medium Density"
  oval 2.1x0.35 smd: 1(-2.75,2.24) 2(-2.75,1.6) 3(-2.75,0.96) 4(-2.75,0.32) 5(-2.75,-0.32) 6(-2.75,-0.96) 7(-2.75,-1.6) 8(-2.75,-2.24) 9(2.75,-2.24) 10(2.75,-1.6) 11(2.75,-0.96) 12(2.75,-0.32) 13(2.75,0.32) 14(2.75,0.96) 15(2.75,1.6) 16(2.75,2.24)
  silkscreen extent -2.87,-2.5 1.3,3.09, body extent -1.99,-2.49 1.99,2.49, height 1.73
SOT23 [mm] "SOT-23; 3 Leads; Body 3.0 x 2.6 mm, inc. leads (LxW max)"
  rect 0.85x1.3 smd: 1(-0.95,-1.1) 2(0.95,-1.1) 3(0,1.1)
  silkscreen extent -2.05,-1.22 1.28,1.1
SOT143 [mm] "SOT-143; 4 Leads; Body 3 x 2.6 mm, inc. leads (LxW max)"
  rect 1.35x1.35 smd: 1(-0.75,-1.1)
  rect 0.9x1.35 smd: 2(0.95,-1.1) 3(0.95,1.1) 4(-0.95,1.1)
  silkscreen extent -1.88,-2.22 1.75,0.7
TSOP65P210X110-6N [mm] "TSOP, 6-Leads, Body 2.2x1.4mm (max), Pitch 0.65mm, IPC Medium Density"
  oval 1.5x0.35 smd: 1(-0.85,0.65) 2(-0.85,0) 3(-0.85,-0.65) 4(0.85,-0.65) 5(0.85,0) 6(0.85,0.65)
  silkscreen extent -0.97,-1.1 0.3,1.5, body extent -0.7,-1.07 0.7,1.08, height 1.1
UX60-MB-5ST [mm] "miniUSB Type B Connector - Metal Shield SMT With Positioning Post"
  rect 0.5x2 smd: 1(-1.6,-1) 2(-0.8,-1) 3(0,-1) 4(0.8,-1) 5(1.6,-1)
  rect 0x0 hole 0.9 unplated: 11(1.75,-3.25) 12(-1.75,-3.25)
  rect 2.5x2.2 smd: CGND(-4.2,-6.55) CGND(-4.2,-1.25) CGND(4.2,-6.55) CGND(4.2,-1.25)
  silkscreen extent -3.85,-9.72 3.85,-0.77, body extent -4.95,-9.55 4.95,-0.55, height 3.94
XTX_Board [mm]
  round 0 hole 0.7 unplated: 0(-111.85,41.65) 0(-111.85,87.45) 0(-2.025,53.25) 0(-2,11.65)
  round 0 hole 1.1 unplated: 0(-111.8,7.45) 0(-111.8,53.25) 0(-2.075,87.45) 0(-2.05,45.85)
  round 0 hole 2.7 unplated: 0(-110.9,2.45) 0(-110.9,92.45) 0(-2.9,2.45) 0(-2.9,92.45)
  rrect50% 1.8x0.35 smd: 1(-1,43.5) 2(-6.7,43.5) 3(-1,42.9) 4(-6.7,42.9) 5(-1,42.3) 6(-6.7,42.3) 7(-1,41.7) 8(-6.7,41.7) 9(-1,41.1) 10(-6.7,41.1) 11(-1,40.5) 12(-6.7,40.5) 13(-1,39.9) 14(-6.7,39.9) 15(-1,39.3) 16(-6.7,39.3) 17(-1,38.7) 18(-6.7,38.7) 19(-1,38.1) 20(-6.7,38.1) 21(-1,37.5) 22(-6.7,37.5) 23(-1,36.9) 24(-6.7,36.9) 25(-1,36.3) 26(-6.7,36.3) 27(-1,35.7) 28(-6.7,35.7) 29(-1,35.1) 30(-6.7,35.1) 31(-1,34.5) 32(-6.7,34.5) 33(-1,33.9) 34(-6.7,33.9) 35(-1,33.3) 36(-6.7,33.3) 37(-1,32.7) 38(-6.7,32.7) 39(-1,32.1) 40(-6.7,32.1) 41(-1,31.5) 42(-6.7,31.5) 43(-1,30.9) 44(-6.7,30.9) 45(-1,30.3) 46(-6.7,30.3) 47(-1,29.7) 48(-6.7,29.7) 49(-1,29.1) 50(-6.7,29.1) 51(-1,28.5) 52(-6.7,28.5) 53(-1,27.9) 54(-6.7,27.9) 55(-1,27.3) 56(-6.7,27.3) 57(-1,26.7) 58(-6.7,26.7) 59(-1,26.1) 60(-6.7,26.1) 61(-1,25.5) 62(-6.7,25.5) 63(-1,24.9) 64(-6.7,24.9) 65(-1,24.3) 66(-6.7,24.3) 67(-1,23.7) 68(-6.7,23.7) 69(-1,23.1) 70(-6.7,23.1) 71(-1,22.5) 72(-6.7,22.5) 73(-1,21.9) 74(-6.7,21.9) 75(-1,21.3) 76(-6.7,21.3) 77(-1,20.7) 78(-6.7,20.7) 79(-1,20.1) 80(-6.7,20.1) 81(-1,19.5) 82(-6.7,19.5) 83(-1,18.9) 84(-6.7,18.9) 85(-1,18.3) 86(-6.7,18.3) 87(-1,17.7) 88(-6.7,17.7) 89(-1,17.1) 90(-6.7,17.1) 91(-1,16.5) 92(-6.7,16.5) 93(-1,15.9) 94(-6.7,15.9) 95(-1,15.3) 96(-6.7,15.3) 97(-1,14.7) 98(-6.7,14.7) 99(-1,14.1) 100(-6.7,14.1) 101(-1.025,85.1) 102(-6.725,85.1) 103(-1.025,84.5) 104(-6.725,84.5) 105(-1.025,83.9) 106(-6.725,83.9) 107(-1.025,83.3) 108(-6.725,83.3) 109(-1.025,82.7) 110(-6.725,82.7) 111(-1.025,82.1) 112(-6.725,82.1) 113(-1.025,81.5) 114(-6.725,81.5) 115(-1.025,80.9) 116(-6.725,80.9) 117(-1.025,80.3) 118(-6.725,80.3) 119(-1.025,79.7) 120(-6.725,79.7) 121(-1.025,79.1) 122(-6.725,79.1) 123(-1.025,78.5) 124(-6.725,78.5) 125(-1.025,77.9) 126(-6.725,77.9) 127(-1.025,77.3) 128(-6.725,77.3) 129(-1.025,76.7) 130(-6.725,76.7) 131(-1.025,76.1) 132(-6.725,76.1) 133(-1.025,75.5) 134(-6.725,75.5) 135(-1.025,74.9) 136(-6.725,74.9) 137(-1.025,74.3) 138(-6.725,74.3) 139(-1.025,73.7) 140(-6.725,73.7) 141(-1.025,73.1) 142(-6.725,73.1) 143(-1.025,72.5) 144(-6.725,72.5) 145(-1.025,71.9) 146(-6.725,71.9) 147(-1.025,71.3) 148(-6.725,71.3) 149(-1.025,70.7) 150(-6.725,70.7) 151(-1.025,70.1) 152(-6.725,70.1) 153(-1.025,69.5) 154(-6.725,69.5) 155(-1.025,68.9) 156(-6.725,68.9) 157(-1.025,68.3) 158(-6.725,68.3) 159(-1.025,67.7) 160(-6.725,67.7) 161(-1.025,67.1) 162(-6.725,67.1) 163(-1.025,66.5) 164(-6.725,66.5) 165(-1.025,65.9) 166(-6.725,65.9) 167(-1.025,65.3) 168(-6.725,65.3) 169(-1.025,64.7) 170(-6.725,64.7) 171(-1.025,64.1) 172(-6.725,64.1) 173(-1.025,63.5) 174(-6.725,63.5) 175(-1.025,62.9) 176(-6.725,62.9) 177(-1.025,62.3) 178(-6.725,62.3) 179(-1.025,61.7) 180(-6.725,61.7) 181(-1.025,61.1) 182(-6.725,61.1) 183(-1.025,60.5) 184(-6.725,60.5) 185(-1.025,59.9) 186(-6.725,59.9) 187(-1.025,59.3) 188(-6.725,59.3) 189(-1.025,58.7) 190(-6.725,58.7) 191(-1.025,58.1) 192(-6.725,58.1) 193(-1.025,57.5) 194(-6.725,57.5) 195(-1.025,56.9) 196(-6.725,56.9) 197(-1.025,56.3) 198(-6.725,56.3) 199(-1.025,55.7) 200(-6.725,55.7) 201(-112.85,9.85) 202(-107.15,9.85) 203(-112.85,10.45) 204(-107.15,10.45) 205(-112.85,11.05) 206(-107.15,11.05) 207(-112.85,11.65) 208(-107.15,11.65) 209(-112.85,12.25) 210(-107.15,12.25) 211(-112.85,12.85) 212(-107.15,12.85) 213(-112.85,13.45) 214(-107.15,13.45) 215(-112.85,14.05) 216(-107.15,14.05) 217(-112.85,14.65) 218(-107.15,14.65) 219(-112.85,15.25) 220(-107.15,15.25) 221(-112.85,15.85) 222(-107.15,15.85) 223(-112.85,16.45) 224(-107.15,16.45) 225(-112.85,17.05) 226(-107.15,17.05) 227(-112.85,17.65) 228(-107.15,17.65) 229(-112.85,18.25) 230(-107.15,18.25) 231(-112.85,18.85) 232(-107.15,18.85) 233(-112.85,19.45) 234(-107.15,19.45) 235(-112.85,20.05) 236(-107.15,20.05) 237(-112.85,20.65) 238(-107.15,20.65) 239(-112.85,21.25) 240(-107.15,21.25) 241(-112.85,21.85) 242(-107.15,21.85) 243(-112.85,22.45) 244(-107.15,22.45) 245(-112.85,23.05) 246(-107.15,23.05) 247(-112.85,23.65) 248(-107.15,23.65) 249(-112.85,24.25) 250(-107.15,24.25) 251(-112.85,24.85) 252(-107.15,24.85) 253(-112.85,25.45) 254(-107.15,25.45) 255(-112.85,26.05) 256(-107.15,26.05) 257(-112.85,26.65) 258(-107.15,26.65) 259(-112.85,27.25) 260(-107.15,27.25) 261(-112.85,27.85) 262(-107.15,27.85) 263(-112.85,28.45) 264(-107.15,28.45) 265(-112.85,29.05) 266(-107.15,29.05) 267(-112.85,29.65) 268(-107.15,29.65) 269(-112.85,30.25) 270(-107.15,30.25) 271(-112.85,30.85) 272(-107.15,30.85) 273(-112.85,31.45) 274(-107.15,31.45) 275(-112.85,32.05) 276(-107.15,32.05) 277(-112.85,32.65) 278(-107.15,32.65) 279(-112.85,33.25) 280(-107.15,33.25) 281(-112.85,33.85) 282(-107.15,33.85) 283(-112.85,34.45) 284(-107.15,34.45) 285(-112.85,35.05) 286(-107.15,35.05) 287(-112.85,35.65) 288(-107.15,35.65) 289(-112.85,36.25) 290(-107.15,36.25) 291(-112.85,36.85) 292(-107.15,36.85) 293(-112.85,37.45) 294(-107.15,37.45) 295(-112.85,38.05) 296(-107.15,38.05) 297(-112.85,38.65) 298(-107.15,38.65) 299(-112.85,39.25) 300(-107.15,39.25) 301(-112.85,55.65) 302(-107.15,55.65) 303(-112.85,56.25) 304(-107.15,56.25) 305(-112.85,56.85) 306(-107.15,56.85) 307(-112.85,57.45) 308(-107.15,57.45) 309(-112.85,58.05) 310(-107.15,58.05) 311(-112.85,58.65) 312(-107.15,58.65) 313(-112.85,59.25) 314(-107.15,59.25) 315(-112.85,59.85) 316(-107.15,59.85) 317(-112.85,60.45) 318(-107.15,60.45) 319(-112.85,61.05) 320(-107.15,61.05) 321(-112.85,61.65) 322(-107.15,61.65) 323(-112.85,62.25) 324(-107.15,62.25) 325(-112.85,62.85) 326(-107.15,62.85) 327(-112.85,63.45) 328(-107.15,63.45) 329(-112.85,64.05) 330(-107.15,64.05) 331(-112.85,64.65) 332(-107.15,64.65) 333(-112.85,65.25) 334(-107.15,65.25) 335(-112.85,65.85) 336(-107.15,65.85) 337(-112.85,66.45) 338(-107.15,66.45) 339(-112.85,67.05) 340(-107.15,67.05) 341(-112.85,67.65) 342(-107.15,67.65) 343(-112.85,68.25) 344(-107.15,68.25) 345(-112.85,68.85) 346(-107.15,68.85) 347(-112.85,69.45) 348(-107.15,69.45) 349(-112.85,70.05) 350(-107.15,70.05) 351(-112.85,70.65) 352(-107.15,70.65) 353(-112.85,71.25) 354(-107.15,71.25) 355(-112.85,71.85) 356(-107.15,71.85) 357(-112.85,72.45) 358(-107.15,72.45) 359(-112.85,73.05) 360(-107.15,73.05) 361(-112.85,73.65) 362(-107.15,73.65) 363(-112.85,74.25) 364(-107.15,74.25) 365(-112.85,74.85) 366(-107.15,74.85) 367(-112.85,75.45) 368(-107.15,75.45) 369(-112.85,76.05) 370(-107.15,76.05) 371(-112.85,76.65) 372(-107.15,76.65) 373(-112.85,77.25) 374(-107.15,77.25) 375(-112.85,77.85) 376(-107.15,77.85) 377(-112.85,78.45) 378(-107.15,78.45) 379(-112.85,79.05) 380(-107.15,79.05) 381(-112.85,79.65) 382(-107.15,79.65) 383(-112.85,80.25) 384(-107.15,80.25) 385(-112.85,80.85) 386(-107.15,80.85) 387(-112.85,81.45) 388(-107.15,81.45) 389(-112.85,82.05) 390(-107.15,82.05) 391(-112.85,82.65) 392(-107.15,82.65) 393(-112.85,83.25) 394(-107.15,83.25) 395(-112.85,83.85) 396(-107.15,83.85) 397(-112.85,84.45) 398(-107.15,84.45) 399(-112.85,85.05) 400(-107.15,85.05)
  silkscreen extent -113.9,-0.05 0.1,94.95, body extent -114,0 0,95, height 19.2